# EAGLE board tempThermostat (EAGLE 6.3)

Size 30.15 x 20.31 mm. Coordinates in mm from the lower left corner, seen from the top.
Outline: 0,0 30.15,0 30.15,20.31 0,20.31 0,0
Copper layers (1*16): Top 0.035mm / dielectric 1.5mm / Bottom 0.035mm
Design rules "default": minimum track width 10mil, minimum drill 24mil, track to track 8mil, track to pad 8mil, pad to pad 8mil, via to via 8mil, smd to smd 8mil, copper to edge 40mil, drill to drill 8mil, minimum pad ring 10mil, minimum via ring 8mil, stop-mask expansion 4mil, vias tented up to drill 0mil, thermal gap 10mil

## Footprints (pad centres in the part's own frame; a part is rotated, then mirrored left to right if it is on the bottom)
SMA = smd 2 x 2: A 2,0; C -2,0
TO-92 = drill 0.813 pad 1.27 octagon: 1 -1.27,0; 2 0,1.905; 3 1.27,0
1X03 = drill 1.016 long: 1 -2.54,0; 2 0,0; 3 2.54,0
1X05 = drill 1.016 long: 1 -5.08,0; 2 -2.54,0; 3 0,0; 4 2.54,0; 5 5.08,0
LSP11 = drill 1.118 pad 2.159 octagon: MP 0,0
R1206 = smd 1.6 x 1.803: 1 -1.422,0; 2 1.422,0
SD4-01 = drill 0.813 long: 1 0,-3.81; 2 0,3.81
SOT23-BEC = smd 1 x 1.4: B -0.95,-1.1; C 0,1.1; E 0.95,-1.1
RFM70 = smd 0.85 x 1.5: CE 2.5,-14.3; CSN 3.8,-14.3; GND -0.1,-14.3; IRQ 9,-14.3; MISO 7.7,-14.3; MOSI 6.4,-14.3; SCK 5.1,-14.3; VDD 1.2,-14.3
SSOP20 = smd 0.4 x 1.5: 1 -2.925,-3.625; 2 -2.275,-3.625; 3 -1.625,-3.625; 4 -0.975,-3.625; 5 -0.325,-3.625; 6 0.325,-3.625; 7 0.975,-3.625; 8 1.625,-3.625; 9 2.275,-3.625; 10 2.925,-3.625; 11 2.925,3.625; 12 2.275,3.625; 13 1.625,3.625; 14 0.975,3.625; 15 0.325,3.625; 16 -0.325,3.625; 17 -0.975,3.625; 18 -1.625,3.625; 19 -2.275,3.625; 20 -2.925,3.625
DIP = drill 0.8: P$1 -3.2,0; P$2 0,0; P$3 2.2,0; P$4 4.4,0; P$5 4.364,3.201; P$6 2.222,3.192; P$7 0,3.2; P$8 -3.2,3.2

## Placement (x,y rotation side)
D1  MBRA340T3  [SMA]  -40.64,-3.81 0 top  (outside the outline)
D2  MBRA340T3  [SMA]  -40.64,-12.7 0 top  (outside the outline)
D3  MBRA340T3  [SMA]  -40.64,-21.59 0 top  (outside the outline)
D4  MBRA340T3  [SMA]  -40.64,-30.48 0 top  (outside the outline)
IC1  DS1820  [TO-92]  27.94,8.89 90 top
JP1  [1X03]  25.4,17.78 0 top
JP2  Prog  [1X05]  2.54,12.7 90 top
LSP1  LSP11  [LSP11]  15.24,2.54 0 top
LSP2  LSP11  [LSP11]  2.54,2.54 0 top
LSP3  LSP11  [LSP11]  27.94,2.54 0 top
R1  1K  [R1206]  -41.91,20.32 0 top  (outside the outline)
R2  1K  [R1206]  -15.24,29.21 0 top  (outside the outline)
R3  1K  [R1206]  -20.32,29.21 0 top  (outside the outline)
R4  1K  [R1206]  -25.4,29.21 0 top  (outside the outline)
S1  [SD4-01]  8.89,5.08 90 top
T1  [SOT23-BEC]  -39.37,27.94 0 top  (outside the outline)
T2  [SOT23-BEC]  -15.24,34.29 0 top  (outside the outline)
T3  [SOT23-BEC]  -20.32,34.29 0 top  (outside the outline)
T4  [SOT23-BEC]  -25.4,34.29 0 top  (outside the outline)
U$1  RFM70  [RFM70]  6.35,24.13 0 top
U$2  PIC16F690  [SSOP20]  8.89,13.97 0 bottom
U$3  [DIP]  22.86,6.35 90 top

## Library data of the parts
D1-D4 = diode
IC1 = ds1820
JP1 JP2 = pinhead
LSP1-LSP3 = solpad
R1-R4 = resistor
S1 = switch-dil; OC_FARNELL: unknown; OC_NEWARK: unknown
T1-T4 = transistor
U$1 = rfm70
U$2 = microchip
U$3 = relay-Fujitsu

## Nets
N$1: IC1.2 U$2.2
N$2: JP1.3 U$3.P$2
N$3: IC1.3 U$2.5
N$5: D1.A D2.A IC1.1 JP2.3 LSP2.MP S1.1 T1.E T2.E U$1.GND U$2.20
N$6: S1.2 U$2.3
N$7: D2.C D4.A T2.C T3.C U$3.P$8
N$8: D1.C D3.A T1.C T4.C U$3.P$1
N$9: JP1.1 U$3.P$4
N$10: JP1.2 U$3.P$3
N$11: D3.C D4.C LSP3.MP T3.E T4.E
N$12: U$1.MISO U$2.13
N$13: R2.2 T2.B
N$14: R4.1 T3.B
N$16: U$1.CE U$2.17
N$17: JP2.2 LSP1.MP U$1.VDD U$2.1
N$18: JP2.4 U$2.19
N$19: JP2.5 U$2.18
N$20: U$1.CSN U$2.16
N$21: U$1.IRQ U$2.14
N$22: U$1.SCK U$2.11
N$23: U$1.MOSI U$2.9
N$24: R1.2 T1.B
N$25: JP2.1 U$2.4
N$27: R3.1 T4.B
N$28: U$2.8
N$30: R1.1 R3.2 U$2.6
N$31: R2.1 R4.2 U$2.7

## Tracks (layer width: path | path; a pad name or v marks a point on that pad's centre or on a via)
N$1  (1 unrouted)
N$2  (1 unrouted)
N$3  (1 unrouted)
N$5  (9 unrouted)
N$6  (1 unrouted)
N$7  (4 unrouted)
N$8  (4 unrouted)
N$9  (1 unrouted)
N$10  (1 unrouted)
N$11  (4 unrouted)
N$12  (1 unrouted)
N$13  (1 unrouted)
N$14  (1 unrouted)
N$16  (1 unrouted)
N$17  (3 unrouted)
N$18  (1 unrouted)
N$19  (1 unrouted)
N$20  (1 unrouted)
N$21  (1 unrouted)
N$22  (1 unrouted)
N$23  (1 unrouted)
N$24  (1 unrouted)
N$25  (1 unrouted)
N$27  (1 unrouted)
N$30  (2 unrouted)
N$31  (2 unrouted)